# Altium PCB PCB1.PcbDoc (part 2 of 2)
Units mil, origin at the board's own origin, x right, y up, seen from the top; angles counter-clockwise.
Board outline 3200 x 1060 mil, 4 copper layers (Top Layer, Ground plane, Power plane, Bottom Layer); 179 components, 88 nets, 587 pads, 145 vias.
Unrouted connection lines stored in the file: 233.
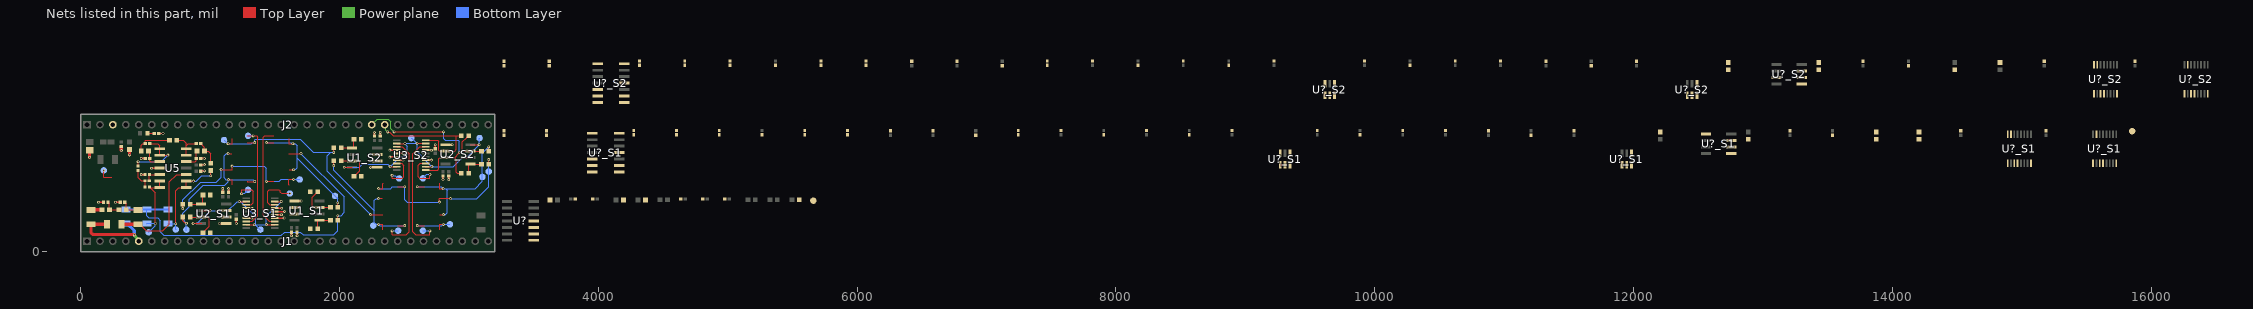
[diagram p4: the nets of this part, all layers, seen from the top]

## Via types
v1: diameter 22, hole 12, Top Layer to Bottom Layer, tented both sides, 137 vias
v2: diameter 22, hole 12, Top Layer to Bottom Layer, 8 vias

## Nets (pads, with @x,y where several pads share a name; then routed paths per layer and width w, separated by ;. In a path a pad name is that pad's centre, name@x,y a point inside that pad or via, vN(x,y) a via of type N, cw(c..) or ccw(c..) an arc to the next point about the centre after c; other vN are vias at no path point) (continued)
B7: J2.23 U3_S2.11 | length 1437.3
  Top Layer w8: v2(2422.11,924.25) v2(2804.57,924.25) ; U3_S2.11@2665.46,629.87 2758.67,629.87 2767.96,639.16 2767.96,717.96 2775.46,725.46 2818.46,725.46 2889.53,725.46 ; v1(2927.46,765.46) 2927.46,763.4 2889.53,725.46 ; 2941.92,605.46 2910.46,605.46 2904.58,611.35 2904.58,710.41 2889.53,725.46
  Power plane w8: J2.23@2250,980 2290.91,1020.91 2377.87,1020.91 2395.46,1003.31 2395.46,948.26 2419.48,924.25 v2(2422.11,924.25)
  Bottom Layer w8: v2(2804.57,924.25) 2804.42,924.11 2804.42,873 2818.46,858.96 2917.46,858.96 2927.46,848.96 v1(2927.46,765.46)
B8: J2.24 U3_S2.20 | length 1074.8
  Top Layer w8: v2@2374.29,924.25 2375.68,922.87 2388.88,922.87 2416.28,895.46 2910.46,895.46 ; U3_S2.20@2665.46,860.19 2758.67,860.19 2767.96,850.9 2767.96,782.96 2775.46,775.46 2818.46,775.46 2889.53,775.46 2904.58,790.52 2904.58,889.58 2910.46,895.46 ; 2941.92,895.46 2910.46,895.46
  Power plane w8: J2.24@2349,1005 J2.24@2351.02,1005 ; J2.24@2350,980 2359.52,970.48 2359.52,938.47 v2(2373.74,924.25)
COMP1_S1_S1: R1_S1.2 U1_S1.7 U?_S1.1@11909.6,670
COMP1_S1_S2: R1_S2.2 U1_S2.7 U?_S2.1@12414.6,1207
COMP1_S2_S1: R?_S1.2@14205,924.54 U?_S1.1@9269.6,670 U?_S1.7@12754,857
COMP1_S2_S2: R?_S2.2@14831,1461.54 U?_S2.1@9614.6,1207 U?_S2.7@13299,1394
COMP2_S1_S1: R7_S1.2 U1_S1.6 U?_S1.3@11984.4,670
COMP2_S1_S2: R7_S2.2 U1_S2.6 U?_S2.3@12489.4,1207
COMP2_S2_S1: R?_S1.2@12206,924.54 U?_S1.3@9344.4,670 U?_S1.6@12754,807 U?_S1.16@14890.43,906
COMP2_S2_S2: R?_S2.2@12731,1461.54 U?_S2.3@9689.4,1207 U?_S2.6@13299,1344 U?_S2.16@15556.43,1443
COMP3_S1_S1: R2_S1.2 U2_S1.7
COMP3_S1_S2: R2_S2.2 U2_S2.7
COMP3_S2_S1: R8_S1.2 U2_S1.6 U?_S1.6@9269.6,758
COMP3_S2_S2: R8_S2.2 U2_S2.6 U?_S2.6@9614.6,1295
GND: C1_S1.2 C1_S2.2 C2_S1.2 C2_S2.2 C3_S1.1 C3_S2.1 C4_S1.2 C4_S2.2 C5_S1.1 C5_S2.1 C12.1 C13.1 C14.2 C16.2 C17.1 C20.1 C21.1 C24.1 C25.1 C26.2 C?.1@3626.47,397 C?.1@3956.68,407 C?.1@4637.68,407 C?.1@4807.68,407 C?.1@4977.68,407 C?.2@3821.32,407 C?.2@4195.53,397 C?.2@4366.53,397 C?_S1.1@6917,898.68 C?_S1.1@13537,898.68 C?_S1.2@6257,933.32 C?_S1.2@6587,933.32 C?_S1.2@11539,933.32 C?_S1.2@13207,933.32 C?_S1.2@14527,933.32 C?_S1.2@15187,933.32 C?_S2.1@7122,1435.68 C?_S2.1@14123,1435.68 C?_S2.2@6422,1470.32 C?_S2.2@6772,1470.32 C?_S2.2@12023,1470.32 C?_S2.2@13773,1470.32 C?_S2.2@15173,1470.32 C?_S2.2@15873,1470.32 J2.3 R41.2 R?.2@5553.54,399 R?_S1.1@4274,901.27 R?_S1.1@5265,901.27 R?_S1.2@10216,934.73 R?_S1.2@10546,934.73 R?_S2.1@4319,1438.27 R?_S2.1@5370,1438.27 R?_S2.2@10621,1471.73 R?_S2.2@10971,1471.73 U1_S1.5 U1_S2.5 U2_S1.5 U2_S2.5 U3_S1.4 U3_S1.5 U3_S1.6 U3_S1.7 U3_S1.14 U3_S1.17 U3_S2.4 U3_S2.5 U3_S2.6 U3_S2.7 U3_S2.14 U3_S2.17 U5.11 U?.10 U?.11 U?_S1.2@9307,670 U?_S1.2@11947,670 U?_S1.3@14941.61,684 U?_S1.3@15601.61,684 U?_S1.4@14967.2,684 U?_S1.4@15627.2,684 U?_S1.5@12754,757 U?_S1.11@4161.34,763.98 U?_S1.15 U?_S2.2@9652,1207 U?_S2.2@12452,1207 U?_S2.3@15607.61,1221 U?_S2.3@16307.61,1221 U?_S2.4@15633.2,1221 U?_S2.4@16333.2,1221 U?_S2.5@13299,1294 U?_S2.11@4201.34,1300.98 U?_S2.15 | length 1577.8
  Top Layer w8: R41.2@603.73,913 604.23,912.5 636.5,912.5 v1(637,912) ; U3_S1.14@1278.61,335.35 1278.78,335.18 1323.82,335.18 v1(1324,335)
  Top Layer w10: v1(140,380.88) C12.1@177.68,380.88 ; v1(270,380.88) C13.1@307.68,380.88 ; C26.2@314.88,811.73 C26.2@315.03,811.58 ; v1@315.03,780.24 v1(315.18,780.09) ; v1(469.13,594.03) C14.2@497.68,594.03 ; v1(469.13,719.01) C21.1@500.04,719.01 ; v1(549.14,644.03) U5.11@611.03,644.03 ; C16.2@926.1,622.58 v1@955.12,622.58 ; C17.1@927.32,671.96 v1(957.01,671.96) ; C20.1@927.32,719.01 v1(957.01,719.01) ; v1(1073.61,216.54) U2_S1.5@1125.61,216.54 ; C5_S1.1@1098.61,458.86 v1(1098.61,486.54) ; C4_S1.2@1143.61,458.86 v1(1143.61,486.54) ; C1_S1.2@1203.61,249.21 1203.76,249.06 1203.76,216.69 v1(1203.92,216.54) ; U3_S1.17@1278.61,258.58 1278.9,258.29 1323.71,258.29 v1(1324,258) ; U3_S1.4@1500.61,258.58 1500.81,258.79 1572.79,258.79 v1(1573,259) ; U3_S1.5@1500.61,284.17 1500.69,284.09 1551.91,284.09 v1(1552,284) ; U3_S1.6@1500.61,309.76 1501.37,309 1576,309 v1(1577,310) ; U3_S1.7@1500.61,335.35 1500.78,335.18 1553.82,335.18 v1(1554,335) ; v1(1628.61,121.54) C2_S1.2@1628.61,148.96 ; U1_S1.5@1651.61,391.28 1651.95,390.94 1703.27,390.94 v1(1703.61,390.6) ; v1(1673.61,121.54) C3_S1.1@1673.61,148.96 ; v1(2240.8,650.22) 2241.05,650.47 2292.22,650.47 U1_S2.5@2292.46,650.72 ; C3_S2.1@2270.46,893.04 v1(2270.46,920.46) ; C2_S2.2@2315.46,893.04 2315.71,893.29 2315.71,920.21 v1(2315.96,920.46) ; v1(2390.46,730.1) 2391.53,731.17 2442.4,731.17 U3_S2.6@2443.46,732.24 ; v1(2390.46,783.42) U3_S2.4@2443.46,783.42 ; U3_S2.7@2443.46,706.65 v1(2491.49,706.65) ; U3_S2.5@2443.46,757.83 v1(2492.46,757.83) ; U3_S2.14@2665.46,706.65 v1(2710.46,706.65) ; U3_S2.17@2665.46,783.42 2665.72,783.17 2710.21,783.17 v1(2710.46,782.92) ; v1(2740.15,825.46) 2740.31,825.31 2740.31,792.94 C1_S2.2@2740.46,792.79 ; v1(2800.46,555.46) C4_S2.2@2800.46,583.14 ; U2_S2.5@2818.46,825.46 2818.54,825.39 2870.39,825.39 v1(2870.46,825.31) ; v1(2845.46,555.46) C5_S2.1@2845.46,583.14
  Top Layer w25: v1(69.88,728.9) C24.1@69.88,781.42 ; v1@315.03,780.24 C26.2@315.03,811.58 ; v1(379.07,746.57) C25.1@379.07,786.92
  other v1: 957.01,622.58
LP_S1: C18.1 R38.2 U5.6 U5.7 | length 257.2
  Top Layer w8: R38.2@743.54,859.01 794.81,859.01 817.25,836.57 817.25,818.9 ; U5.6@817.25,744.03 U5.7@817.25,794.03 817.25,818.9 ; C18.1@892.68,834.01 832.36,834.01 817.25,818.9
LP_S2: C19.1 R34.2 U5.8 U5.9 | length 507.5
  Top Layer w8: R34.2@444.14,660.26 v1(444.14,694.03) ; C19.1@534.68,834.01 595.84,834.01 611.03,818.82 U5.8@611.03,794.03 U5.9@611.03,744.03 611.51,744.52 674.52,744.52 v1(675,745)
  Bottom Layer w8: v1(444.14,694.03) 624.03,694.03 v1(675,745)
LP_SIG: C15.2 R32.1 TP_LPSIG1.1 U5.13 U5.14 | length 582.7
  Top Layer w8: C15.2@532.32,499.21 533.11,499.21 C15.2@538.29,494.03 ; v1(579,216.69) 579,452.53 541.32,490.22 541.32,491.01 C15.2@538.29,494.03 ; U5.13@611.03,544.03 U5.14@611.03,494.03 C15.2@538.29,494.03
  Bottom Layer w8: R32.1@512.5,215.23 513.96,216.69 v1(579,216.69) 576.32,214.01 576.32,198.15 TP_LPSIG1.1@526.22,148.05
NetC12_2: C12.2 R28.2 R29.1 | length 137.3
  Top Layer w8: C12.2@212.32,380.88 213.11,380.88 223.54,370.44 R28.2@223.54,323.87 ; R28.2@223.54,323.62 R28.2@223.54,323.87 ; R28.2@225,325.32 R28.2@223.54,323.87 ; R29.1@296.46,323.87 R28.2@223.54,323.87
NetC13_2: C13.2 R29.2 R30.1 | length 154.8
  Top Layer w8: C13.2@342.32,380.88 343.11,380.88 353.54,370.44 R29.2@353.54,323.62 ; R29.2@353.67,323.75 356.41,321 R30.1@445,321
NetC14_1: C14.1 R33.1 U5.12 | length 126.4
  Top Layer w8: R33.1@531.73,546.62 532.32,547.21 C14.1@532.32,594.03 U5.12@611.03,594.03
NetC15_1: C15.1 R33.2 R34.1 | length 167.3
  Top Layer w8: R34.1@444.14,626.79 444.14,571.62 469.13,546.62 R33.2@498.27,546.62 498.27,499.8 C15.1@497.68,499.21
NetC18_2: C18.2 R35.1 R37.2 | length 200.6
  Top Layer w8: C18.2@927.32,834.01 928.11,834.01 957.01,805.12 R35.1@957.01,776.76 985.19,776.76 1005,756.95 R37.2@1005,682.56
NetC19_2: C19.2 R36.2 R38.1 | length 290.4
  Top Layer w8: R36.2@469.13,776.76 469.13,823.15 480,834.01 C19.2@500.04,834.01 500.04,854.3 504.73,858.99 R38.1@686.43,858.99
NetC20_2: C20.2 R35.2 U5.5 | length 158.5
  Top Layer w8: U5.5@817.25,694.03 884.3,694.03 892.68,702.41 C20.2@892.68,719.01 892.68,771.77 R35.2@899.92,779.01
NetC21_2: C21.2 R36.1 U5.10 | length 158
  Top Layer w8: R36.1@526.22,776.76 534.68,768.29 C21.2@534.68,719.01 534.68,701.78 542.43,694.03 U5.10@611.03,694.03
NetC?_S1_1: C?_S1.1@3271,898.68 R?_S1.1@4604,901.27 R?_S1.2@5595,934.73 U?_S1.6@3955.12,663.98
NetC?_S1_2: C?_S1.2@3601,933.32 R?_S1.1@5925,901.27 R?_S1.2@4935,934.73 U?_S1.9@4161.34,663.98
NetC?_S2_1: C?_S2.1@3271,1435.68 R?_S2.1@4669,1438.27 R?_S2.2@5720,1471.73 U?_S2.6@3995.12,1200.98
NetC?_S2_2: C?_S2.2@3621,1470.32 R?_S2.1@6070,1438.27 R?_S2.2@5019,1471.73 U?_S2.9@4201.34,1200.98
NetD1_1: D1.1 R41.1 | length 53.1
  Top Layer w8: D1.1@518,915 520,913 R41.1@570.27,913
NetR1_S1_1: R1_S1.1 R3_S1.2 U1_S1.1 | length 160.4
  Top Layer w8: R1_S1.1@1832.15,174.73 1832.15,234.28 1839.15,241.28 R3_S1.2@1930.06,241.28
NetR1_S2_1: R1_S2.1 R3_S2.2 U1_S2.1 | length 320.7
  Top Layer w8: U1_S2.1@2104.92,800.72 R3_S2.2@2014.01,800.72 U1_S2.1@2104.92,800.72 ; U1_S2.1@2104.92,800.72 U1_S2.1@2111.92,807.72 ; U1_S2.1@2104.92,800.72 U1_S2.1@2111.92,807.72 ; U1_S2.1@2111.92,807.72 R1_S2.1@2111.92,867.27 U1_S2.1@2111.92,807.72
NetR2_S1_1: R2_S1.1 R4_S1.2 U2_S1.1 | length 163.8
  Top Layer w8: R4_S1.2@847.15,366.54 U2_S1.1@931.61,366.54 938.06,366.54 945.06,373.54 R2_S1.1@945.06,436.54
NetR2_S2_1: R2_S2.1 R4_S2.2 U2_S2.1 | length 327.6
  Top Layer w8: U2_S2.1@2999.01,668.46 R2_S2.1@2999.01,605.46 U2_S2.1@2999.01,668.46 ; U2_S2.1@2999.01,668.46 U2_S2.1@3006.01,675.46 ; U2_S2.1@2999.01,668.46 U2_S2.1@3006.01,675.46 ; U2_S2.1@3006.01,675.46 U2_S2.1@3012.46,675.46 ; U2_S2.1@3006.01,675.46 U2_S2.1@3012.46,675.46 ; U2_S2.1@3012.46,675.46 R4_S2.2@3096.92,675.46 U2_S2.1@3012.46,675.46
NetR5_S1_2: R5_S1.2 R7_S1.1 U1_S1.3 | length 274.5
  Top Layer w8: R7_S1.1@1831.16,461.54 1788.61,418.98 1788.61,349.58 1796.91,341.28 R5_S1.2@1930.06,341.28
NetR5_S2_2: R5_S2.2 R7_S2.1 U1_S2.3 | length 550.9
  Top Layer w8: R7_S2.1@2112.91,580.46 R7_S2.1@2111.92,580.46 R7_S2.1@2112.91,580.46 ; R7_S2.1@2112.91,580.46 2155.46,623.02 ; R7_S2.1@2112.91,580.46 2155.46,623.02 ; 2147.16,700.72 2155.46,692.42 ; 2147.16,700.72 R5_S2.2@2014.01,700.72 2147.16,700.72 ; 2147.16,700.72 2155.46,692.42 ; 2155.46,623.02 2155.46,692.42 ; 2155.46,623.02 2155.46,692.42
NetR6_S1_2: R6_S1.2 R8_S1.1 U2_S1.3 | length 281.3
  Top Layer w8: R6_S1.2@847.15,266.54 U2_S1.3@931.61,266.54 983.61,266.54 993.61,256.54 993.61,195.08 959.76,161.24 959.76,160.25 946.05,146.54 R8_S1.1@945.06,146.54
NetR6_S2_2: R6_S2.2 R8_S2.1 U2_S2.3 | length 562.6
  Top Layer w8: 2950.46,785.46 2950.46,846.92 ; 2950.46,785.46 2950.46,846.92 ; 2950.46,785.46 2960.46,775.46 ; 2950.46,785.46 2960.46,775.46 ; 2950.46,846.92 R8_S2.1@2984.31,880.76 ; 2950.46,846.92 R8_S2.1@2984.31,880.76 ; 2960.46,775.46 U2_S2.3@3012.46,775.46 ; 2960.46,775.46 U2_S2.3@3012.46,775.46 ; R8_S2.1@2984.31,880.76 R8_S2.1@2984.31,881.75 ; R8_S2.1@2984.31,880.76 R8_S2.1@2984.31,881.75 ; R8_S2.1@2984.31,881.75 R8_S2.1@2998.02,895.46 ; R8_S2.1@2984.31,881.75 R8_S2.1@2998.02,895.46 ; R8_S2.1@2998.02,895.46 R8_S2.1@2999.01,895.46 R8_S2.1@2998.02,895.46 ; U2_S2.3@3012.46,775.46 R6_S2.2@3096.92,775.46 U2_S2.3@3012.46,775.46
NetR27_2: R27.2 R28.1 | length 87.6
  Top Layer w25: R27.2@80,321 81.44,322.43 165.02,322.43 R28.1@166.46,323.87
NetR?_S1_1: R?_S1.1@14205,867.46 R?_S1.2@13875,924.54 U?_S1.1@12560,907
NetR?_S1_2: R?_S1.2@4274,934.73 R?_S1.2@7245,934.73 U?_S1.5@3955.12,713.98
NetR?_S2_1: R?_S2.1@12731,1404.46 R?_S2.2@13431,1461.54 U?_S2.3@13105,1344
NetR?_S2_2: R?_S2.2@4319,1471.73 R?_S2.2@7470,1471.73 U?_S2.5@3995.12,1250.98
NetU?_8: U?.8 U?.9
SEL0_S1: U?_S1.1@15550.43,684
SEL0_S2: U?_S2.1@16256.43,1221
SEL0_S2_S1: U?_S1.1@14890.43,684
SEL0_S2_S2: U?_S2.1@15556.43,1221
SEL_S1_S1: U?_S1.4@11984.4,758
SEL_S1_S2: U?_S2.4@12489.4,1295
SEL_S2_S1: U?_S1.4@9344.4,758
SEL_S2_S2: U?_S2.4@9689.4,1295
SHIFT1_S1: R?_S1.1@5595,901.27 TP_SHIFT1_S1.1 U3_S1.3 U?_S1.8@15729.57,684 | length 800.5
  Top Layer w8: 1493.27,893.92 1421.92,893.92 1409.99,881.99 1409.99,279.67 1456.67,232.99 U3_S1.3@1500.61,232.99
SHIFT1_S2: R?_S2.1@5720,1438.27 TP_SHIFT1_S2.1 U3_S2.3 U?_S2.8@16435.57,1221 | length 935.9
  Top Layer w8: v1@2407.2,154.81 2407.2,129.46 2515.46,129.46 2539.46,153.46 2539.46,756.94 2487.4,809.01 U3_S2.3@2443.46,809.01
  Bottom Layer w8: v1(2407.2,159.69) 2407.85,160.35 2453.35,160.35 TP_SHIFT1_S2.1@2454,161
SHIFT2_S1: R?_S1.1@8566,901.27 TP_SHIFT2_S1.1 U3_S1.8 U?_S1.8@15069.57,684 | length 345.3
  Top Layer w8: U3_S1.8@1500.61,360.94 1462.2,360.94 1445.61,377.54 1445.61,464.84 1458.27,477.5 1536.87,477.5 1542.28,472.1 1542.28,459.36 1553.2,448.44 v1(1616.98,448.44)
SHIFT2_S2: R?_S2.1@8871,1438.27 TP_SHIFT2_S2.1 U3_S2.8 U?_S2.8@15735.57,1221 | length 334.7
  Top Layer w8: v1(2407.2,589.03) 2407.2,564.5 2485.8,564.5 2498.46,577.16 2498.46,664.46 2481.87,681.06 U3_S2.8@2443.46,681.06
  Bottom Layer w8: v1(2407.2,589.03) 2409.08,587.15 2430.2,587.15 2452.85,564.5 TP_SHIFT2_S2.1@2461.46,564.5
SHIFT3_S1: R?_S1.2@8896,934.73 TP_SHIFT3_S1.1 U3_S1.13 | length 338.2
  Top Layer w8: v1(1244.34,446.62) 1244.34,476.54 1322.94,476.54 1335.61,463.87 1335.61,376.57 1319.02,359.98 U3_S1.13@1280.61,359.98
  Bottom Layer w8: v1(1244.34,446.62) 1247.02,449.3 1267.29,449.3 TP_SHIFT3_S1.1@1294.53,476.54
SHIFT3_S2: R?_S2.2@9221,1471.73 TP_SHIFT3_S2.1 U3_S2.13 | length 342.6
  Top Layer w8: U3_S2.13@2663.46,682.02 2625.06,682.02 2608.46,665.43 2608.46,578.13 2621.13,565.46 2699.73,565.46 v1(2699.73,595.32)
  Bottom Layer w8: TP_SHIFT3_S2.1@2645,565.46 2674.86,595.32 v1(2699.73,595.32)
SHIFT4_S1: R?_S1.2@5925,934.73 TP_SHIFT4_S1.1 U3_S1.18 | length 843.1
  Top Layer w8: U3_S1.18@1280.61,232.99 1327.28,232.99 1370.99,276.71 1370.99,883.15 1360.22,893.92 v1(1332.97,893.92) 1285.73,893.92
  Bottom Layer w8: TP_SHIFT4_S1.1@1294.53,893.92 v1(1332.97,893.92)
SHIFT4_S2: R?_S2.2@6070,1471.73 TP_SHIFT4_S2.1 U3_S2.18 | length 948.8
  Top Layer w8: U3_S2.18@2663.46,809.01 2619.53,809.01 2567.46,756.94 2567.46,153.46 2591.46,129.46 2699.73,129.46 v1(2699.73,159.69)
  Bottom Layer w8: TP_SHIFT4_S2.1@2645,161 2645.65,160.35 2699.08,160.35 v1(2699.73,159.69)
SIG: R3_S1.1 R4_S1.1 R5_S1.1 R26.2 R31.2 R32.2 R?_S1.1@7245,901.27 | length 2892.5
  Top Layer w8: 1610.34,756.54 v1(1703.27,756.54) ; R3_S1.1@1987.15,241.28 v1(1987.15,276.54)
  Bottom Layer w8: R32.2@512.5,325.47 512.5,276.4 527.72,261.18 595.84,261.18 617.66,239.36 617.66,152.9 644.56,126 1551.57,126 1576.18,150.61 1698.46,150.61 1719.61,129.46 1956.92,129.46 1987.15,159.69 v1(1987.15,276.54) 2012.5,276.54 2037.74,301.78 2037.74,422.06 v1(1703.27,756.54)
  Bottom Layer w15: R26.2@350,325.47 R32.2@512.5,325.47 R31.2@675,325.47
SIG1_S2: C?_S1.1@3601,898.68 R3_S2.1 R4_S2.1 R5_S2.1 R?_S1.1@4935,901.27 R?_S2.1@7470,1438.27 TP_SIG4_S1.1 U?_S1.8@4161.34,613.98 | length 1815.3
  Top Layer w8: v1(1140.61,832.54) 1170.87,832.54 1170.28,833.13 1170.28,872.54 ; 1287.27,841.56 v1(1345.61,841.56) ; v1(1956.92,765.46) R3_S2.1@1956.92,800.72 ; v1(2240.8,285.46) 2333.73,285.46
  Bottom Layer w8: TP_SIG4_S1.1@1108.51,861.53 1110.06,861.53 1139.05,832.54 v1(1140.61,832.54) 1318.61,832.54 1324.95,838.88 1342.93,838.88 v1(1345.61,841.56) 1345.61,861.53 1350.29,866.22 1697.68,866.22 1798.43,765.46 1933.01,765.46 ; v1(1956.92,765.46) 1933.01,765.46 ; v1(2240.8,285.46) 1906.33,619.94 1906.33,740.22 1931.57,765.46 1933.01,765.46
SIG2_S1: C?_S1.2@3271,933.32 R6_S1.1 R?_S1.1@7906,901.27 R?_S1.1@12885,867.46 R?_S1.1@13875,867.46 R?_S1.2@4604,934.73 TP_SIG1_S1.1 U?_S1.7@3955.12,613.98 | length 1126.2
  Top Layer w8: v1(1435.61,841.56) 1493.49,841.56 ; 1610.93,872.54 1610.93,833.13 1610.34,832.54 v1(1640.61,832.54) ; 1612.34,631.54 v1(1645.61,631.54) ; 1987.15,341.28 v1(1987.15,377.5)
  Bottom Layer w8: v1(1435.61,841.56) 1627.8,841.56 1636.82,832.54 1660.11,832.54 1673.61,819.04 1673.61,721.89 ; v1(1645.61,631.54) 1648.28,634.21 1661.28,634.21 1673.61,646.54 1673.61,721.89 ; v1(1987.15,377.5) 1987.15,408.35 1673.61,721.89
SIG2_S2: C?_S2.2@3271,1470.32 R6_S2.1 R?_S2.1@8170,1438.27 R?_S2.1@13431,1404.46 R?_S2.1@14481,1404.46 R?_S2.2@4669,1471.73 TP_SIG1_S2.1 U?_S2.7@3995.12,1150.98 | length 1129.3
  Top Layer w8: v1(1956.92,664.5) 1956.92,700.72 ; v1(2303.46,209.46) 2333.73,209.46 2333.14,208.87 2333.14,169.46 ; v1(2303.46,409.46) 2303.96,409.96 2331.23,409.96 2331.73,410.46 ; 2450.58,200.44 v1(2505.46,200.44)
  Bottom Layer w8: v1(1956.92,664.5) 1956.92,628.08 2270.46,314.54 ; 2283.96,408.96 2270.46,395.46 2270.46,314.54 ; 2283.96,409.46 v1(2303.46,409.46) ; v1@2300.79,206.79 v1(2303.46,209.46) ; v1(2505.46,200.44) 2312.48,200.44 v1(2303.46,209.46) ; 2270.46,314.54 2270.46,222.96 2283.96,209.46 v1(2303.46,209.46)
SIG3_S1: C?_S1.2@10878,933.32 R?_S1.2@8236,934.73 R?_S1.2@9556,934.73 TP_SIG2_S1.1 U?_S1.1@3955.12,913.98 | length 1417.1
  Top Layer w8: v1(790.06,331.59) 790.06,366.54 ; v1(1085.61,632.54) 1086.11,632.04 1170.37,632.04 1170.87,632.54 v1(1170.87,660.54) ; v1(1435.61,541.56) 1493.49,541.56 ; 1610.93,516 1610.34,516.59 1610.34,556 1611.14,556.8 1644.81,556.8 v1(1645.61,557.6)
  Bottom Layer w8: v1(790.06,331.59) 790.06,400.06 926.98,536.98 1050,536.98 1085.61,572.59 v1(1085.61,632.54) ; v1(1170.87,660.54) 1419.61,660.54 1435.61,644.53 v1(1435.61,541.56) 1534.16,541.56 1550.2,557.6 v1(1645.61,557.6) 1646.01,557.2 1692.89,557.2 TP_SIG2_S1.1@1693.29,556.8
SIG3_S2: C?_S2.2@11323,1470.32 R?_S2.2@8520,1471.73 R?_S2.2@9921,1471.73 TP_SIG2_S2.1 U?_S2.1@3995.12,1450.98 | length 1402.2
  Top Layer w8: v1(2303.46,486) 2333.73,486 2333.73,525.41 2333.14,526 ; 2450.58,500.44 v1(2505.46,500.44) ; v1(2773.2,381.46) 2773.2,409.46 2773.7,409.96 2857.96,409.96 v1(2858.46,409.46) ; 3154.01,675.46 v1(3154.01,710.41)
  Bottom Layer w8: v1@2305.15,486 v1(2303.46,486) 2395.46,486 2409.91,500.44 v1(2505.46,500.44) 2505.46,400.46 2524.46,381.46 v1(2773.2,381.46) ; v1(2858.46,409.46) 3062.55,409.46 3154.01,500.92 v1(3154.01,710.41)
SIG4_S1: C?_S1.1@11208,898.68 R?_S1.1@9886,901.27 R?_S1.2@7575,934.73 TP_SIG3_S1.1 U?_S1.14@4161.34,913.98 | length 1322.3
  Top Layer w8: 790.06,266.54 790.06,236.82 805.81,221.07 815.32,221.07 v1(818,218.39) ; v1(1140.61,756.54) 1169.87,756.54 ; v1(1142.5,556) 1170.87,556 1170.28,555.41 1170.28,516 ; 1287.27,541.56 1287.8,541.03 v1(1345.61,541.03)
  Bottom Layer w8: TP_SIG3_S1.1@817,161 v1@817,210.39 ; v1(818,218.39) 801.41,234.98 801.41,239.98 790.06,251.33 790.06,296.92 838.61,345.46 838.61,405.61 947,514 1116,514 1142.5,540.5 v1(1142.5,556) ; v1@1139.5,756.98 1124.98,756.98 1110,742 1110,569.5 1123.5,556 v1(1142.5,556) ; v1(1345.61,541.03) 1345.61,543.37 1332.97,556 v1(1142.5,556)
SIG4_S2: C?_S2.1@11673,1435.68 R?_S2.1@10271,1438.27 R?_S2.2@7820,1471.73 TP_SIG3_S2.1 U?_S2.14@4201.34,1450.98 | length 1252.8
  Top Layer w8: v1(2601.92,500.44) 2656.8,500.44 ; 2773.79,526 2773.79,486.59 2773.2,486 v1(2801.57,486) ; 2774.2,285.46 v1(2803.46,285.46) ; 3154.01,775.46 v1(3154.01,809.01)
  Bottom Layer w8: v1(2601.92,500.44) 2787.13,500.44 v1(2801.57,486) ; v1@2804.57,285.02 2819.09,285.02 2834.07,300 2834.07,472.5 2820.57,486 v1(2801.57,486) ; v1(3154.01,809.01) 3105.46,760.46 3105.46,541.46 3050,486 v1(2801.57,486)
SIG5_S2: C?_S2.1@3621,1435.68 R?_S2.1@5019,1438.27 TP_SIG4_S2.1 U?_S2.8@4201.34,1150.98 | length 381.6
  Top Layer w8: v1(2601.92,200.44) 2656.8,200.44 ; 2773.79,169.46 2773.79,208.87 2773.2,209.46 v1(2803.46,209.46)
  Bottom Layer w8: v1(2601.92,200.44) 2792.55,200.44 2801.57,209.46 v1(2803.46,209.46) 2803.87,209.87 2853.66,209.87 TP_SIG4_S2.1@2854.06,210.28
SIG_BUFF: R31.1 R37.1 TP_SIGBUFF1.1 U5.1 U5.2 | length 747.5
  Top Layer w8: v1(735,215) 735,469.07 759.97,494.03 U5.1@817.25,494.03 U5.2@817.25,544.03 v1(872.6,544.03) ; R37.1@1005,625.47 1005.47,625 v1(1005.47,585.96)
  Bottom Layer w8: R31.1@675,215.23 675.23,215 v1(735,215) 735.5,214.5 735.5,170.5 TP_SIGBUFF1.1@736,170 ; v1(872.6,544.03) 895.09,544.03 937.02,585.96 v1(1005.47,585.96)
SIGIN: J1.5 R25.1 R26.1 R27.1 TP_SIGIN1.1 | length 714.4
  Top Layer w25: R25.1@204.88,210.76 R27.1@80,210.76 80,146.69 94.64,132.04 411.27,132.04 v1(414.49,128.82)
  Power plane w25: v1(414.49,128.82) 414.49,124.73 450,89.21 J1.5@450,80
  Bottom Layer w25: R26.1@350,215.23 361.81,215.23 414.49,162.55 v1(414.49,128.82)
SIGIN_BUFF: R25.2 R30.2 U5.3 | length 892.9
  Top Layer w8: R30.2@445,210.76 456.81,210.76 506.33,161.24 635.24,161.24 686.46,212.46 686.46,538.46 742.03,594.03 U5.3@817.25,594.03
  Top Layer w25: R25.2@315.12,210.76 R30.2@445,210.76
Tap: TP_TAP_1.1 TP_TAP_2.1 TP_TAP_3.1 TP_TAP_4.1 U3_S1.2 U3_S1.9 U3_S1.12 U3_S1.19 U3_S2.2 U3_S2.9 U3_S2.12 U3_S2.19 | length 3455
  Top Layer w8: v1(180.01,626.79) 180.01,575.2 179.81,575 242.68,575 ; v1(869.37,216.84) 869.52,216.69 931.45,216.69 931.61,216.54 ; 931.61,316.54 v1(1000.47,316.54) ; v1(1227.81,386.54) U3_S1.12@1278.61,386.54 ; U3_S1.19@1278.61,207.4 v1(1342.15,207.4) ; v1(1435.8,207.78) U3_S1.2@1499.34,207.78 ; U3_S1.9@1500.61,386.54 v1(1551.09,386.54) ; v1(2037.74,650.93) 2037.85,650.83 2098.36,650.83 2098.46,650.72 ; v1(2391.71,655.84) U3_S2.9@2442.2,655.84 ; U3_S2.2@2443.46,834.6 v1(2507.01,834.6) ; v1(2600.66,834.98) U3_S2.19@2664.2,834.98 ; U3_S2.12@2664.2,655.84 v1(2714.99,655.84) ; v1(2949,726.38) 2949.46,725.92 3012,725.92 3012.46,725.46 ; 3012.46,825.46 v1(3079.9,825.46)
  Bottom Layer w8: v1(869.37,216.84) 900.78,216.84 v1(1000.47,316.54) 1139.1,316.54 1209.1,386.54 v1(1227.81,386.54) 1230.49,383.86 1238.79,383.86 1354.94,267.71 1354.94,220.19 v1@1342.34,207.59 ; TP_TAP_3.1@1389.92,169.46 1354.66,204.72 1344.83,204.72 v1(1342.15,207.4) v1@1342.34,207.59 ; v1(1551.09,386.54) 1435.8,271.24 v1(1435.8,207.78) 1435.61,207.59 v1@1342.34,207.59 ; v1(2037.74,650.93) 2153.45,650.93 2177.98,675.46 2372.09,675.46 v1(2391.71,655.84) 2468.83,732.96 2507.53,732.96 2524.46,749.9 2524.46,813.35 2507.01,830.81 v1(2507.01,834.6) 2507.2,834.79 2600.47,834.79 v1(2600.66,834.98) ; TP_TAP_1.1@2555.86,876.73 2557.38,876.73 2599.14,834.98 v1(2600.66,834.98) ; TP_TAP_4.1@3083.02,876.73 3081.46,875.17 3081.46,827.03 v1(3079.9,825.46) 2980.82,726.38 v1(2949,726.38) 2878.45,655.84 v1(2714.99,655.84) 2600.66,770.18 v1(2600.66,834.98)
pads on no net: C?_S1.1@10878,898.68 C?_S1.2@11208,933.32 C?_S2.1@11323,1435.68 C?_S2.2@11673,1470.32 J1.1 J1.2 J1.3 J1.4 J1.6 J1.7 J1.8 J1.9 J1.10 J1.11 J1.12 J1.13 J1.14 J1.15 J1.16 J1.17 J1.18 J1.19 J1.20 J1.21 J1.22 J1.23 J1.24 J1.25 J1.26 J1.27 J1.28 J1.29 J1.30 J1.31 J1.32 J2.2 J2.4 J2.5 J2.6 J2.7 J2.8 J2.9 J2.10 J2.11 J2.12 J2.13 J2.14 J2.15 J2.16 J2.25 J2.26 J2.27 J2.28 J2.29 J2.30 J2.31 J2.32 R40.1 R40.2 R?_S1.1@7575,901.27 R?_S1.1@8236,901.27 R?_S1.1@8896,901.27 R?_S1.1@9556,901.27 R?_S1.1@10216,901.27 R?_S1.1@10546,901.27 R?_S1.1@12206,867.46 R?_S1.2@5265,934.73 R?_S1.2@7906,934.73 R?_S1.2@8566,934.73 R?_S1.2@9886,934.73 R?_S1.2@12885,924.54 R?_S2.1@7820,1438.27 R?_S2.1@8520,1438.27 R?_S2.1@9221,1438.27 R?_S2.1@9921,1438.27 R?_S2.1@10621,1438.27 R?_S2.1@10971,1438.27 R?_S2.1@14831,1404.46 R?_S2.2@5370,1471.73 R?_S2.2@8170,1471.73 R?_S2.2@8871,1471.73 R?_S2.2@10271,1471.73 R?_S2.2@14481,1461.54 U3_S1.15 U3_S2.15 U?_S1.2@3955.12,863.98 U?_S1.3@3955.12,813.98 U?_S1.3@12560,807 U?_S1.6@11909.6,758 U?_S1.9@15069.57,906 U?_S1.9@15729.57,906 U?_S1.10 U?_S1.11@15018.39,906 U?_S1.11@15678.39,906 U?_S1.12 U?_S1.13 U?_S2.1@13105,1444 U?_S2.2@3995.12,1400.98 U?_S2.3@3995.12,1350.98 U?_S2.6@12414.6,1295 U?_S2.9@15735.57,1443 U?_S2.9@16435.57,1443 U?_S2.10 U?_S2.11@15684.39,1443 U?_S2.11@16384.39,1443 U?_S2.12 U?_S2.13
copper on no net: | length 3558.1
  Top Layer w8: 179.81,500.2 180.01,500 242.68,500 245,502.32 v1(245,536.98) ; 1204.34,593.56 1204.34,631.54 1206.31,631.54 1216.33,641.56 1287.27,641.56 ; 1204.34,794.54 1203.34,793.54 1203.34,756.54 1205.31,756.54 1220.29,741.56 1287.27,741.56 ; 1210.87,476.54 1204.93,482.48 1204.93,516 1204.34,516.59 1204.34,556 1206.31,556 1235.15,584.84 1280.56,584.84 1287.27,591.56 ; 1252.27,893.92 1227.1,893.92 1205.72,872.54 1204.93,872.54 1204.34,871.94 1204.34,832.54 1211.16,825.71 1224.3,825.71 1258.45,791.56 1287.27,791.56 ; 1493.49,591.56 1495.06,589.99 1540.92,589.99 1574.91,556 1576.87,556 1576.87,516.59 1576.28,516 1576.28,483.45 1570.34,477.5 ; 1493.49,641.56 1566.89,641.56 1576.91,631.54 1578.87,631.54 1576.87,629.54 1576.87,593.56 ; 1493.49,691.56 1560.48,691.56 1580.5,671.54 1581.28,671.54 1581.28,716.54 v1(1553.61,716.54) ; 1493.49,741.56 1559.92,741.56 1574.91,756.54 1576.87,756.54 1576.87,794.54 ; 1493.49,791.56 1500.79,798.85 1531.68,798.85 1558.82,825.99 1570.33,825.99 1576.87,832.54 1576.87,871.94 1576.28,872.54 1575.5,872.54 1554.11,893.92 1526.73,893.92 ; 2367.2,247.46 2367.2,285.46 2369.17,285.46 2384.15,300.44 2450.58,300.44 ; 2367.2,448.44 2367.2,412.46 2365.2,410.46 2367.17,410.46 2377.19,400.44 2450.58,400.44 ; 2373.73,129.46 2367.79,135.41 2367.79,169.46 2367.2,170.06 2367.2,209.46 2373.74,216.01 2385.25,216.01 2412.39,243.15 2443.28,243.15 2450.58,250.44 ; 2373.73,564.5 2367.79,558.55 2367.79,526 2367.2,525.41 2367.2,486 2369.17,486 2396.7,458.46 2409.78,458.46 2410.5,457.74 2443.28,457.74 2450.58,450.44 ; v1(2390.46,325.46) 2362.79,325.46 2362.79,370.46 2363.58,370.46 2383.59,350.44 2450.58,350.44 ; 2656.8,250.44 2685.62,250.44 2719.77,216.29 2732.91,216.29 2739.73,209.46 2739.73,170.06 2739.14,169.46 2739.14,135.41 2733.2,129.46 ; 2656.8,300.44 2723.78,300.44 2738.76,285.46 2740.73,285.46 2740.73,248.46 2739.73,247.46 ; 2656.8,350.44 2657.24,350.01 2714.56,350.01 v1(2714.99,349.58) ; 2656.8,400.44 2727.74,400.44 2737.76,410.46 2739.73,410.46 2739.73,448.44 ; 2656.8,450.44 2663.51,457.16 2708.92,457.16 2737.76,486 2739.73,486 2739.73,525.41 2739.14,526 2739.14,559.52 2733.2,565.46 ; 2773.2,247.46 v1(2803.46,247.46)
  Top Layer w10: 77.57,537.33 77.92,537.68 ; 277.32,500 277.42,500.1 307.58,500.1 v1(307.68,500.2) ; 277.32,575 277.36,575.04 309.96,575.04 v1(310,575.08) ; v1(1140.61,794.54) 1170.87,794.54 ; v1(1143.61,593.56) 1170.87,593.56 ; v1(1233.61,691.56) 1287.27,691.56 ; 1610.34,593.56 1611.34,592.56 1644.13,592.56 v1(1645.13,591.56) ; 1610.34,794.54 v1(1640.61,794.54) ; 1615.93,671.54 v1(1645.61,671.54) ; 1615.93,716.54 v1(1645.61,716.54) ; v1(2298.46,325.46) 2328.14,325.46 ; v1(2298.46,370.46) 2328.14,370.46 ; v1(2303.46,247.46) 2333.73,247.46 ; v1(2303.46,448.44) 2333.73,448.44 ; 2773.2,448.44 v1(2800.46,448.44)
  Top Layer w25: v1(35,500) 77.72,500 77.92,500.2 ; v1@35.35,537.33 77.57,537.33
  other v1: 35,536.98

## Polygon pours and split planes (outlines as drawn)
no net on Dimensions "Tap_Pout" (solid): 0,1060 0,0 3196.03,0 3200,3.97 3200,1060
+5 on Power plane "+5_L03_P001" (solid, pour order 1): 0,1060 0,0 3200,0 3200,1060
GND on Ground plane "GND_L02_P000" (solid, pour order 0): 0,1060 0,0 3200,0 3200,1060
GND on Bottom Layer "Tap_Pout" (solid, pour order 7): 0,1060 0,0 3200,0 3200,1060
Tap on Top Layer "TAP_L01_P006" (solid, remove dead copper, pour order 6): 11.37,1067.03 11.37,7.03 3211.37,7.03 3211.37,1067.03

## Keep-outs
Keep-Out Layer:
  the board outline again, w10

## Other copper
Top Layer:
  pour cut-out: 119.88,896.57 119.88,797.05 289.88,797.05 289.88,896.57

## Silkscreen, mask and mechanical layers (free items; w line width, h text height)
Top Overlay:
  text "5V" at 27,1020.91 h30
  text "GND" at 211,1020.91 h30
  text "B1" at 1631.48,1020.91 h30
  text "B2" at 1725.68,1020.91 h30
  text "B3" at 1825.68,1020.91 h30
  text "B4" at 1925.68,1020.91 h30
  text "B5" at 2025.68,1020.91 h30
  text "B6" at 2125.68,1020.91 h30
  text "B7" at 2225.68,1020.91 h30
  text "B8" at 2325.68,1020.91 h30
  text "BYPASS" at 172,128 h30
Bottom Overlay:
  text "LP" at 558,241 h30 r270
  text "BUFF" at 718,209 h30 r270
  text "SIGIN" at 393,186 h30 r270
Dimensions:
  the board outline again, w10

## Text inside footprints (layer, text, board x,y; h text height)
U1_S1: Top Overlay "*" at 1808.61,201.28 h30 r180
U1_S2: Top Overlay "*" at 2135.46,840.72 h30
U2_S1: Top Overlay "*" at 968.61,406.54 h30
U2_S2: Top Overlay "*" at 2975.46,635.46 h30 r180
U3_S1: Top Overlay "*" at 1469.61,151.97 h30 r180; Top Assembly "*" at 1475.61,219.97 h30 r180
U3_S2: Top Overlay "*" at 2474.46,890.03 h30; Top Assembly "*" at 2468.46,822.03 h30
U?_S1: Top Overlay "*" at 15541.43,661.5 h50 r90; Top Assembly "*" at 15592.5,709 h50 r90
U?_S1: Top Overlay "*" at 14881.43,661.5 h50 r90; Top Assembly "*" at 14932.5,709 h50 r90
U?_S1: Top Overlay "*" at 12597,947 h5
U?_S1: Top Overlay "RefDes" at 11972,639 h50 r90; Top Overlay "*" at 11892.6,647.5 h50 r90; Top Overlay "REFDES" at 11972,626.5 h50 r90; Top Assembly "RefDes2" at 11972,626.5 h50 r90; Top Assembly "*" at 11892.6,647.5 h50 r90
U?_S1: Top Overlay "RefDes" at 9332,639 h50 r90; Top Overlay "*" at 9252.6,647.5 h50 r90; Top Overlay "REFDES" at 9332,626.5 h50 r90; Top Assembly "RefDes2" at 9332,626.5 h50 r90; Top Assembly "*" at 9252.6,647.5 h50 r90
U?_S2: Top Overlay "*" at 16247.43,1198.5 h50 r90; Top Assembly "*" at 16298.5,1246 h50 r90
U?_S2: Top Overlay "*" at 15547.43,1198.5 h50 r90; Top Assembly "*" at 15598.5,1246 h50 r90
U?_S2: Top Overlay "*" at 13142,1484 h5
U?_S2: Top Overlay "RefDes" at 12477,1176 h50 r90; Top Overlay "*" at 12397.6,1184.5 h50 r90; Top Overlay "REFDES" at 12477,1163.5 h50 r90; Top Assembly "RefDes2" at 12477,1163.5 h50 r90; Top Assembly "*" at 12397.6,1184.5 h50 r90
U?_S2: Top Overlay "RefDes" at 9677,1176 h50 r90; Top Overlay "*" at 9597.6,1184.5 h50 r90; Top Overlay "REFDES" at 9677,1163.5 h50 r90; Top Assembly "RefDes2" at 9677,1163.5 h50 r90; Top Assembly "*" at 9597.6,1184.5 h50 r90